# Altium PCB Current_sensors.PcbDoc
Units mil, origin at the board's own origin, x right, y up, seen from the top; angles counter-clockwise.
Board outline 5866.14 x 1968.5 mil, 2 copper layers (Top Layer, Bottom Layer); 4 components, 0 nets, 28 pads, 0 vias.
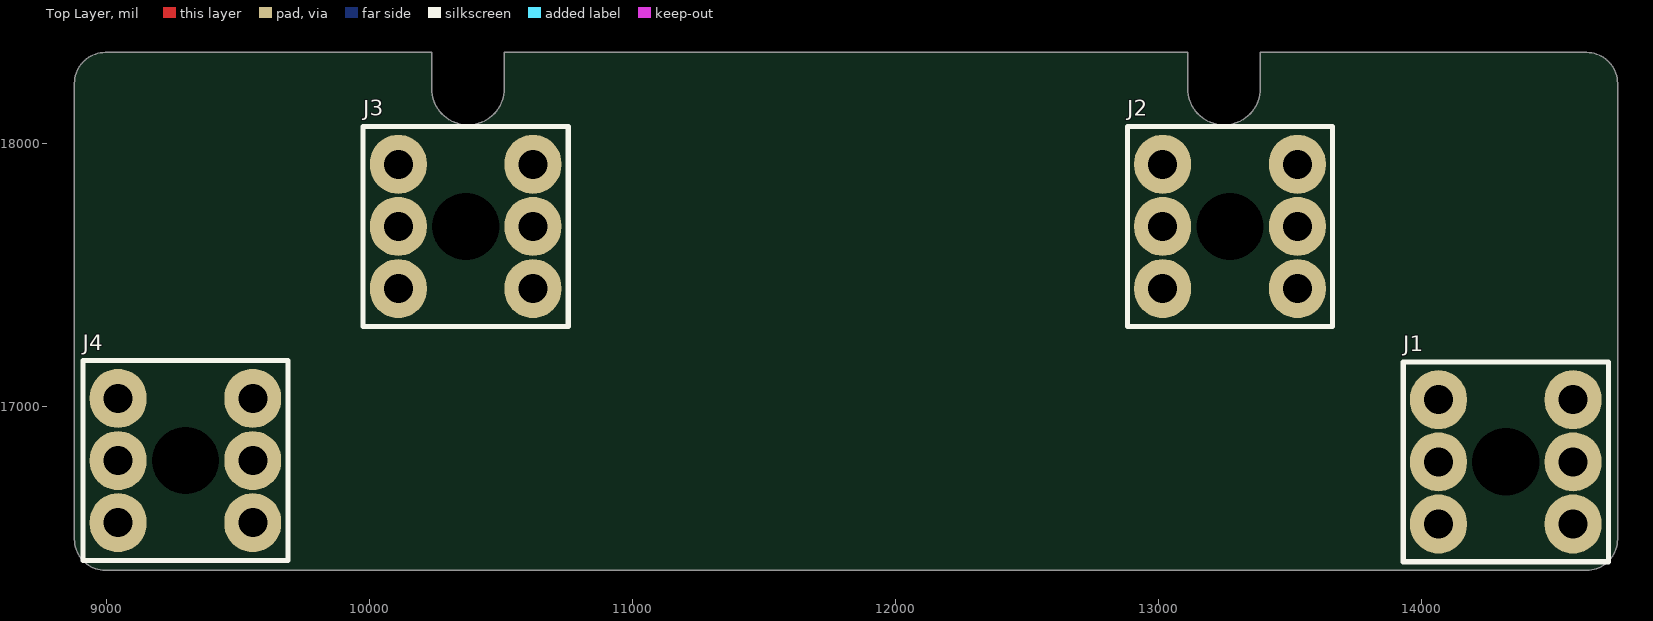
[diagram p0: Top Layer view]
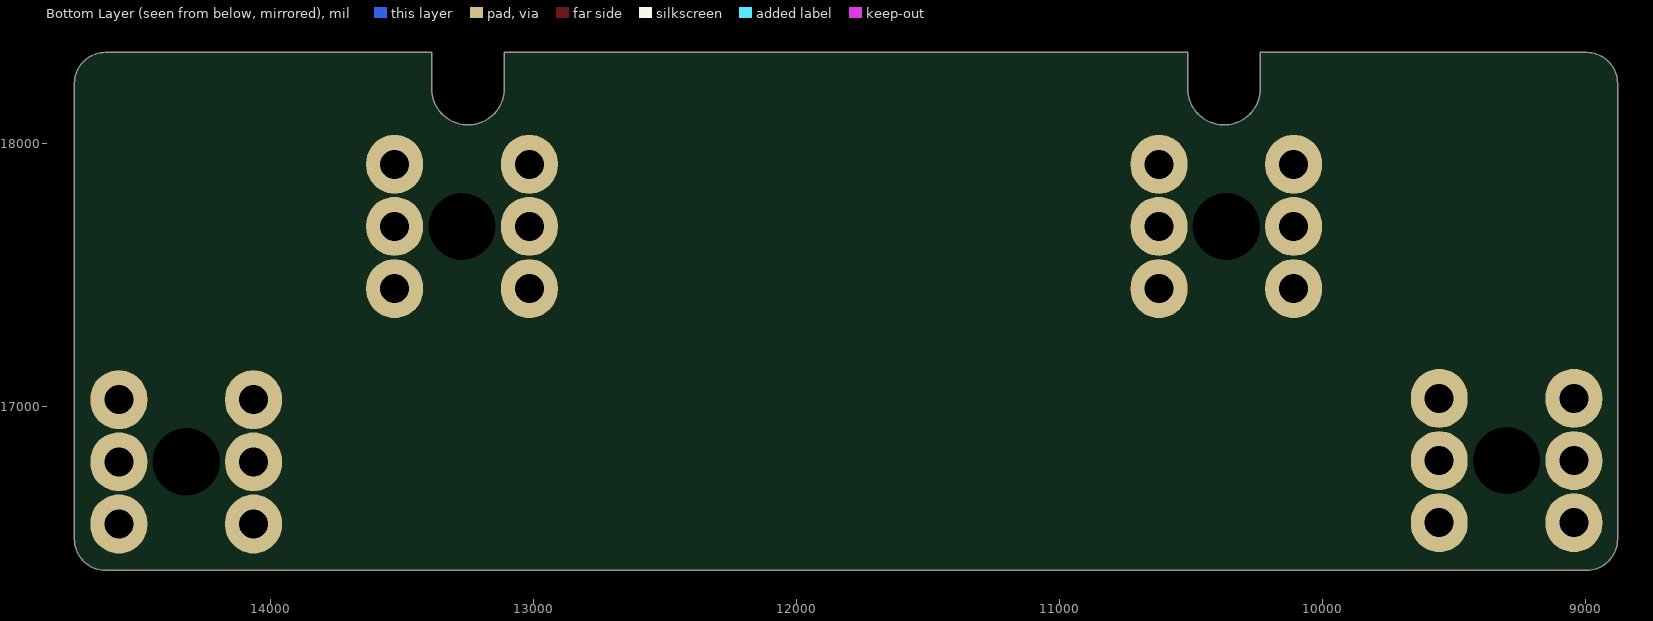
[diagram p1: Bottom Layer view, seen from below]

## Layer stack, top to bottom
Top Solder: solder mask 0.4, Solder Resist, Dk 3.5
Top Layer: signal copper 1.4
Dielectric 1: dielectric 12.6, FR-4, Dk 4.8
Bottom Layer: signal copper 1.4
Bottom Solder: solder mask 0.4, Solder Resist, Dk 3.5

## Board outline
8996.06,16377.95 cw(c8996.06,16496.06) 8877.95,16496.06 8877.95,18228.35 cw(c8996.06,18228.35) 8996.06,18346.46 10236.22,18346.46 10236.22,18208.66 ccw(c10374.02,18208.66) 10511.81,18208.66 10511.81,18346.46 13110.24,18346.46 13110.24,18208.66 ccw(c13248.03,18208.66) 13385.83,18208.66 13385.83,18346.46 14625.98,18346.46 cw(c14625.98,18228.35) 14744.09,18228.35 14744.09,16496.06 cw(c14625.98,16496.06) 14625.98,16377.95

## Design rules (kind name [scope] priority, off if disabled: settings)
Clearance [All] p1: gap=10 ignorepadtopadclearanceinfootprint=FALSE
PolygonConnect [All] p1: connectstyle=Relief reliefconductorwidth=10 reliefentries=4 polygonreliefangle="90 Angle" airgapwidth=10
RoutingVias [All] p1: holewidth=28 width=50 viastyle="Through Hole" minholewidth=28 minwidth=50 maxholewidth=28 maxwidth=50
SolderMaskExpansion [All] p1: expansion=4 istentingtop=FALSE
Width [All] p1: maxlimit=10 minlimit=10 preferedwidth=10
30 further rules are at their usual default settings.

## Components (designator, comment, footprint, x,y, rotation, side; value= is the part's Value field where it differs from the comment)
J1 "M5 PCB" M5_Conn 14319.09,16790 r0 top
J2 "M5 PCB" M5_Conn 13270.91,17685 r0 top
J3 "M5 PCB" M5_Conn 10365,17685 r0 top
J4 "M5 PCB" M5_Conn 9300,16795 r0 top

## Footprints (in the part's own frame and the unit in brackets; to place one, negate y for a bottom-side part, rotate by r counter-clockwise, add the part's x,y. Pads: shape width x height; smd on the part's side, far side on the other; paste and mask are expansions set on the pad)
M5_Conn [mm]
  round 1.524 hole 6.5: 0(0,0)
  oval 5.5x5.7 hole 2.8: 1(-6.5,-6) 1(-6.5,0) 1(-6.5,6) 1(6.5,-6) 1(6.5,0) 1(6.5,6)
  silkscreen extent -9.91,-9.65 9.91,9.65, body extent -7.25,-7.1 7.25,7.1, height 5.5

## Part data
J1 J2 J3 J4: library part Klema_15_A

## Nets (pads, with @x,y where several pads share a name; then routed paths per layer and width w, separated by ;. In a path a pad name is that pad's centre, name@x,y a point inside that pad or via, vN(x,y) a via of type N, cw(c..) or ccw(c..) an arc to the next point about the centre after c; other vN are vias at no path point)
pads on no net: J1.0 J1.1 J2.0 J2.1 J3.0 J3.1 J4.0 J4.1

## Silkscreen, mask and mechanical layers (free items; w line width, h text height)
Mechanical 1:
  circle w0.5: c11338.58,16574.8 r59.06
  circle w0.5: c14251.97,18149.61 r59.06
  circle w0.5: c14586.61,17165.35 r59.06
  circle w0.5: c9035.43,17165.35 r59.06
  circle w0.5: c9370.08,18149.61 r59.06
  circle w0.5: c11338.58,18149.61 r59.06
  circle w0.5: c12283.46,16574.8 r59.06
  circle w0.5: c12283.46,18149.61 r59.06
  lines w0.5: 8877.95,16496.06 ccw(c8996.06,16496.06) 8996.06,16377.95 14625.98,16377.95 ccw(c14625.98,16496.06) 14744.09,16496.06 14744.09,18228.35 ccw(c14625.98,18228.35) 14625.98,18346.46 13385.83,18346.46 13385.83,18208.66 cw(c13248.03,18208.66) 13110.24,18208.66 13110.24,18346.46 10511.81,18346.46 10511.81,18208.66 cw(c10374.02,18208.66) 10236.22,18208.66 10236.22,18346.46 8996.06,18346.46 ccw(c8996.06,18228.35) 8877.95,18228.35 8877.95,16496.06